# Altium PCB Plata.PcbDoc
Units mm, origin at the board's own origin, x right, y up, seen from the top; angles counter-clockwise.
Board outline 65 x 65 mm, 2 copper layers (Top Layer, Bottom Layer), stack 1.571 mm thick; 45 components, 45 nets, 179 pads, 49 vias.
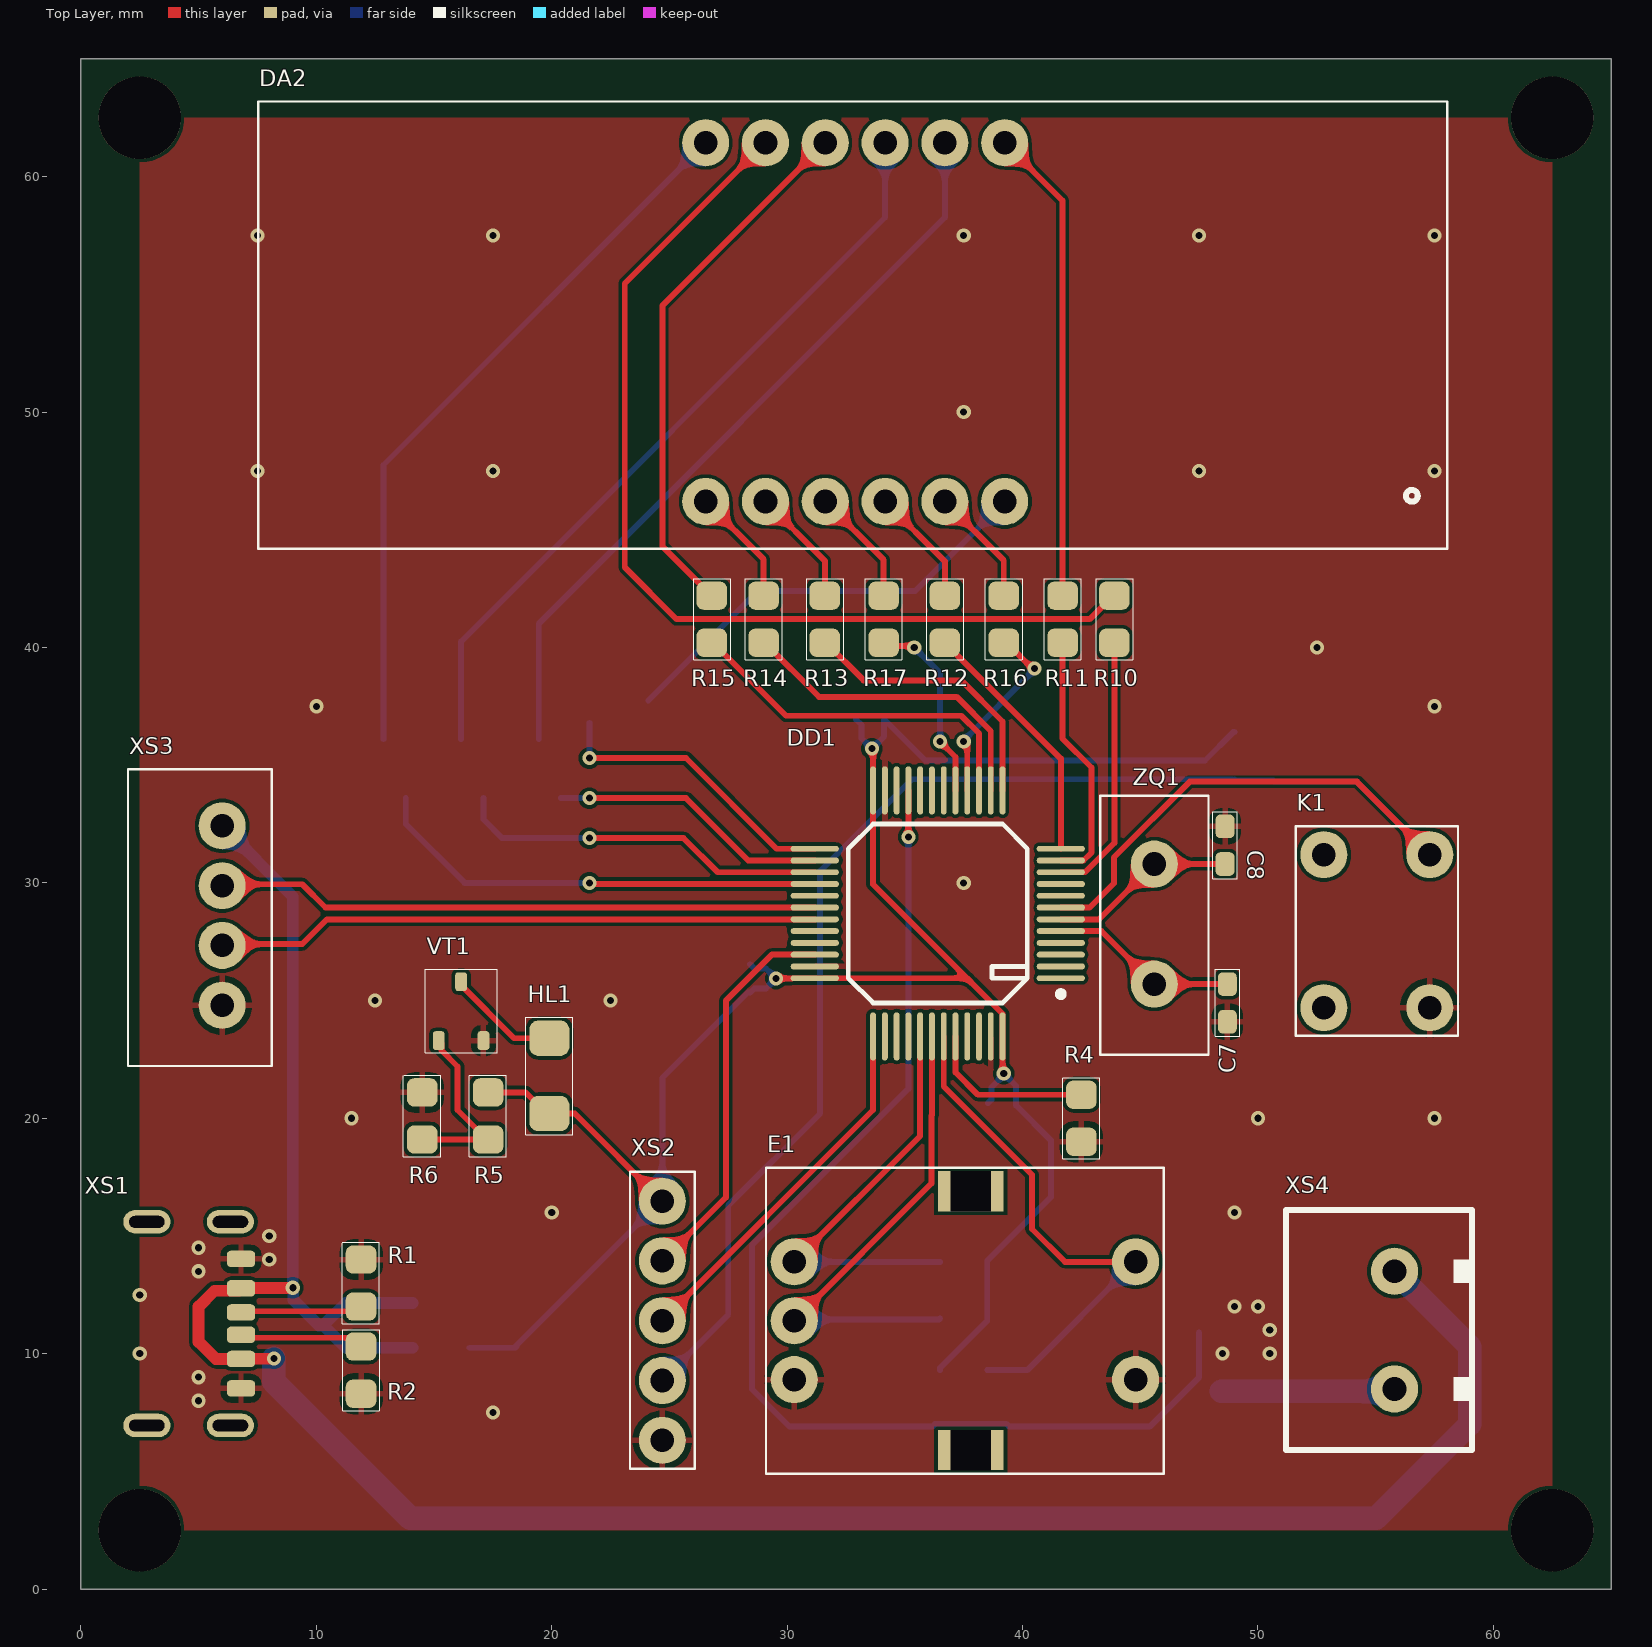
[diagram p0: Top Layer view]
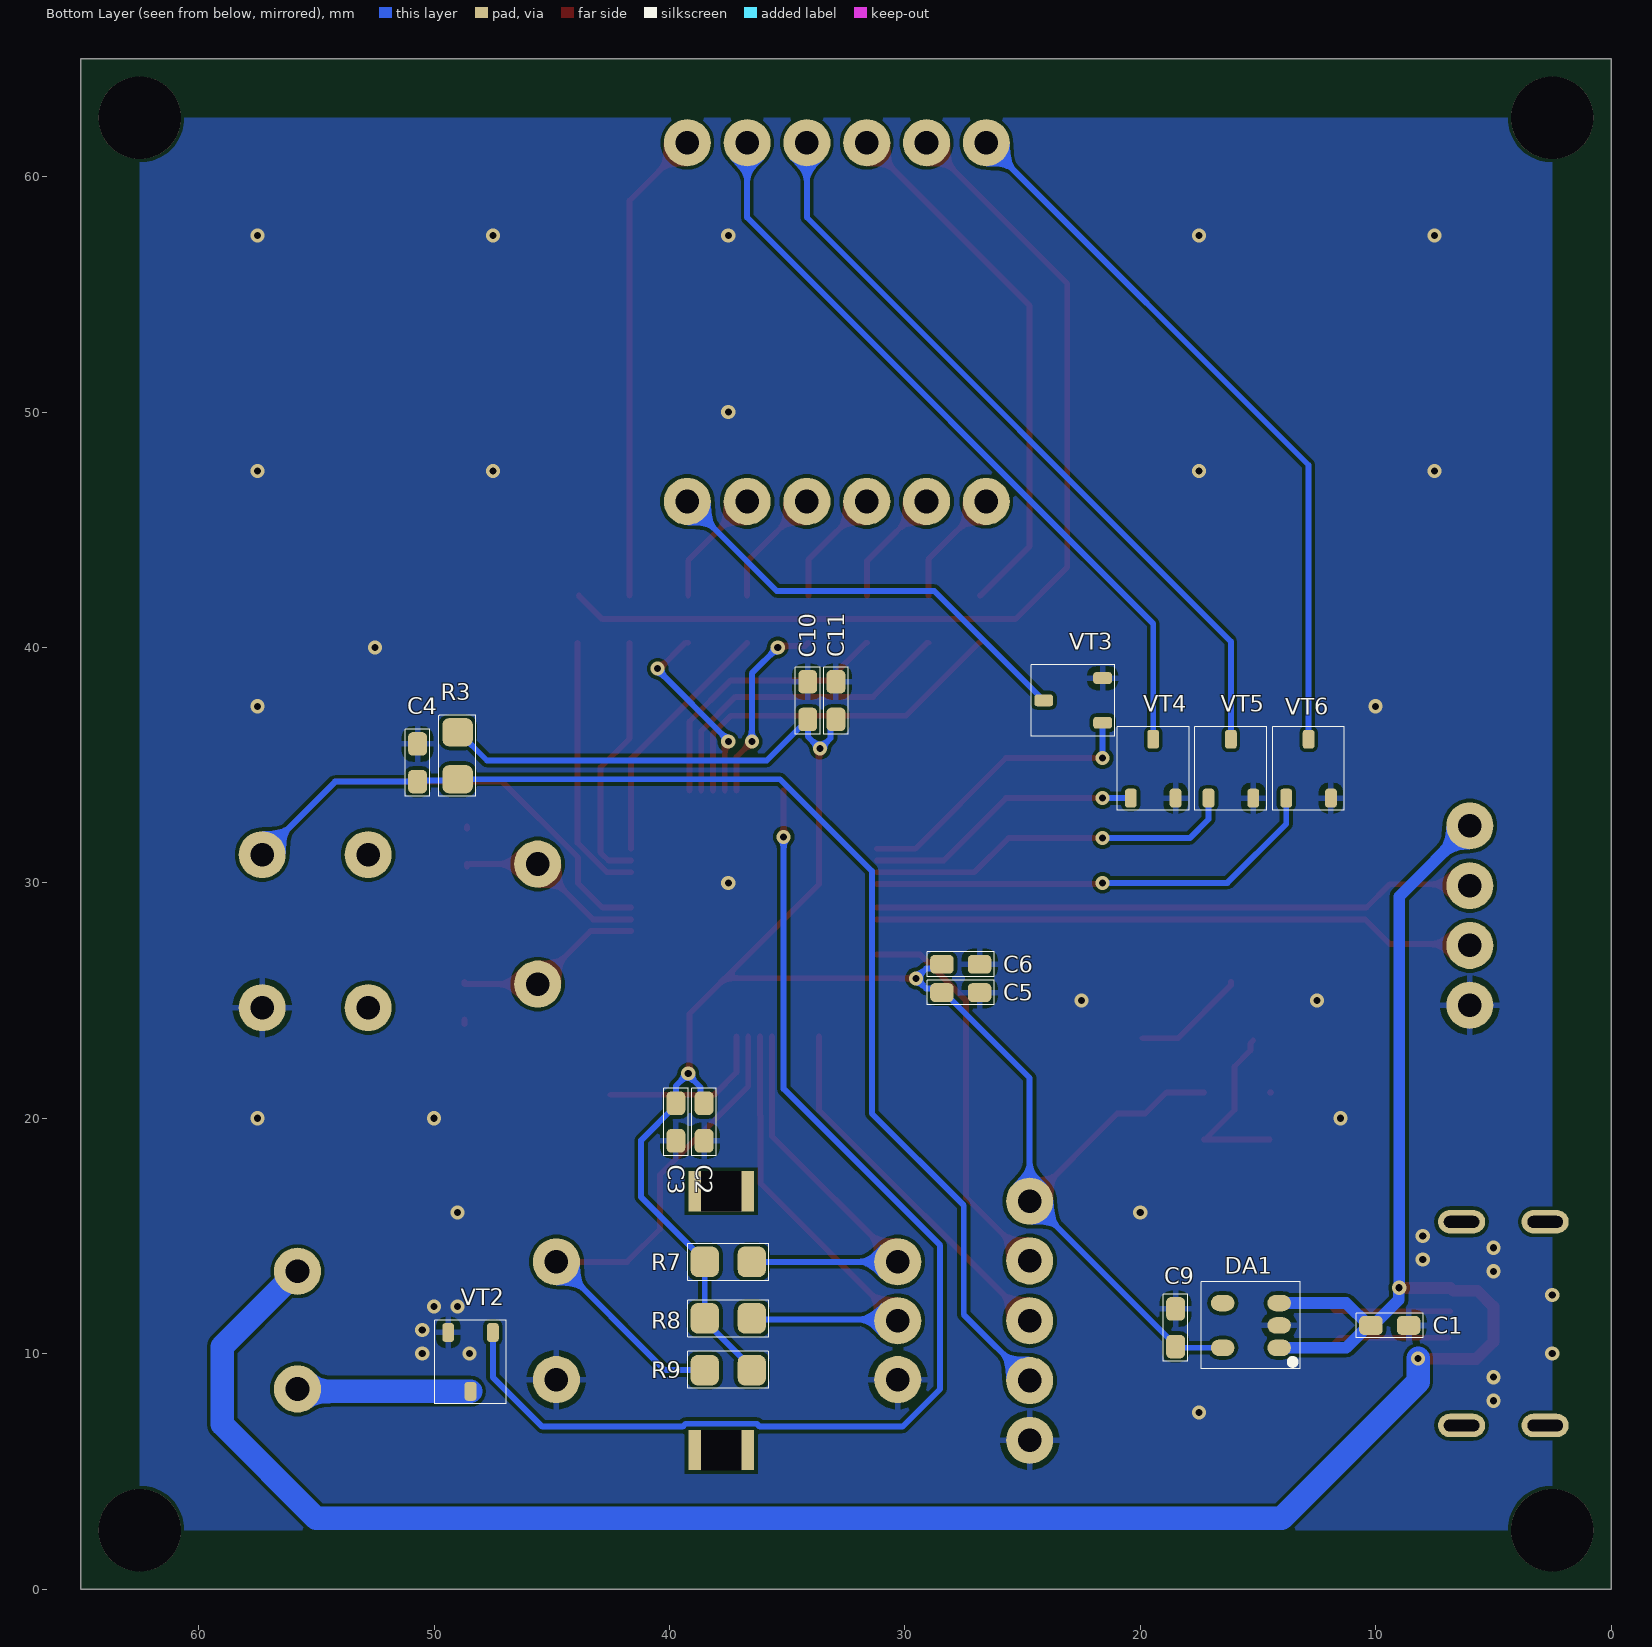
[diagram p1: Bottom Layer view, seen from below]
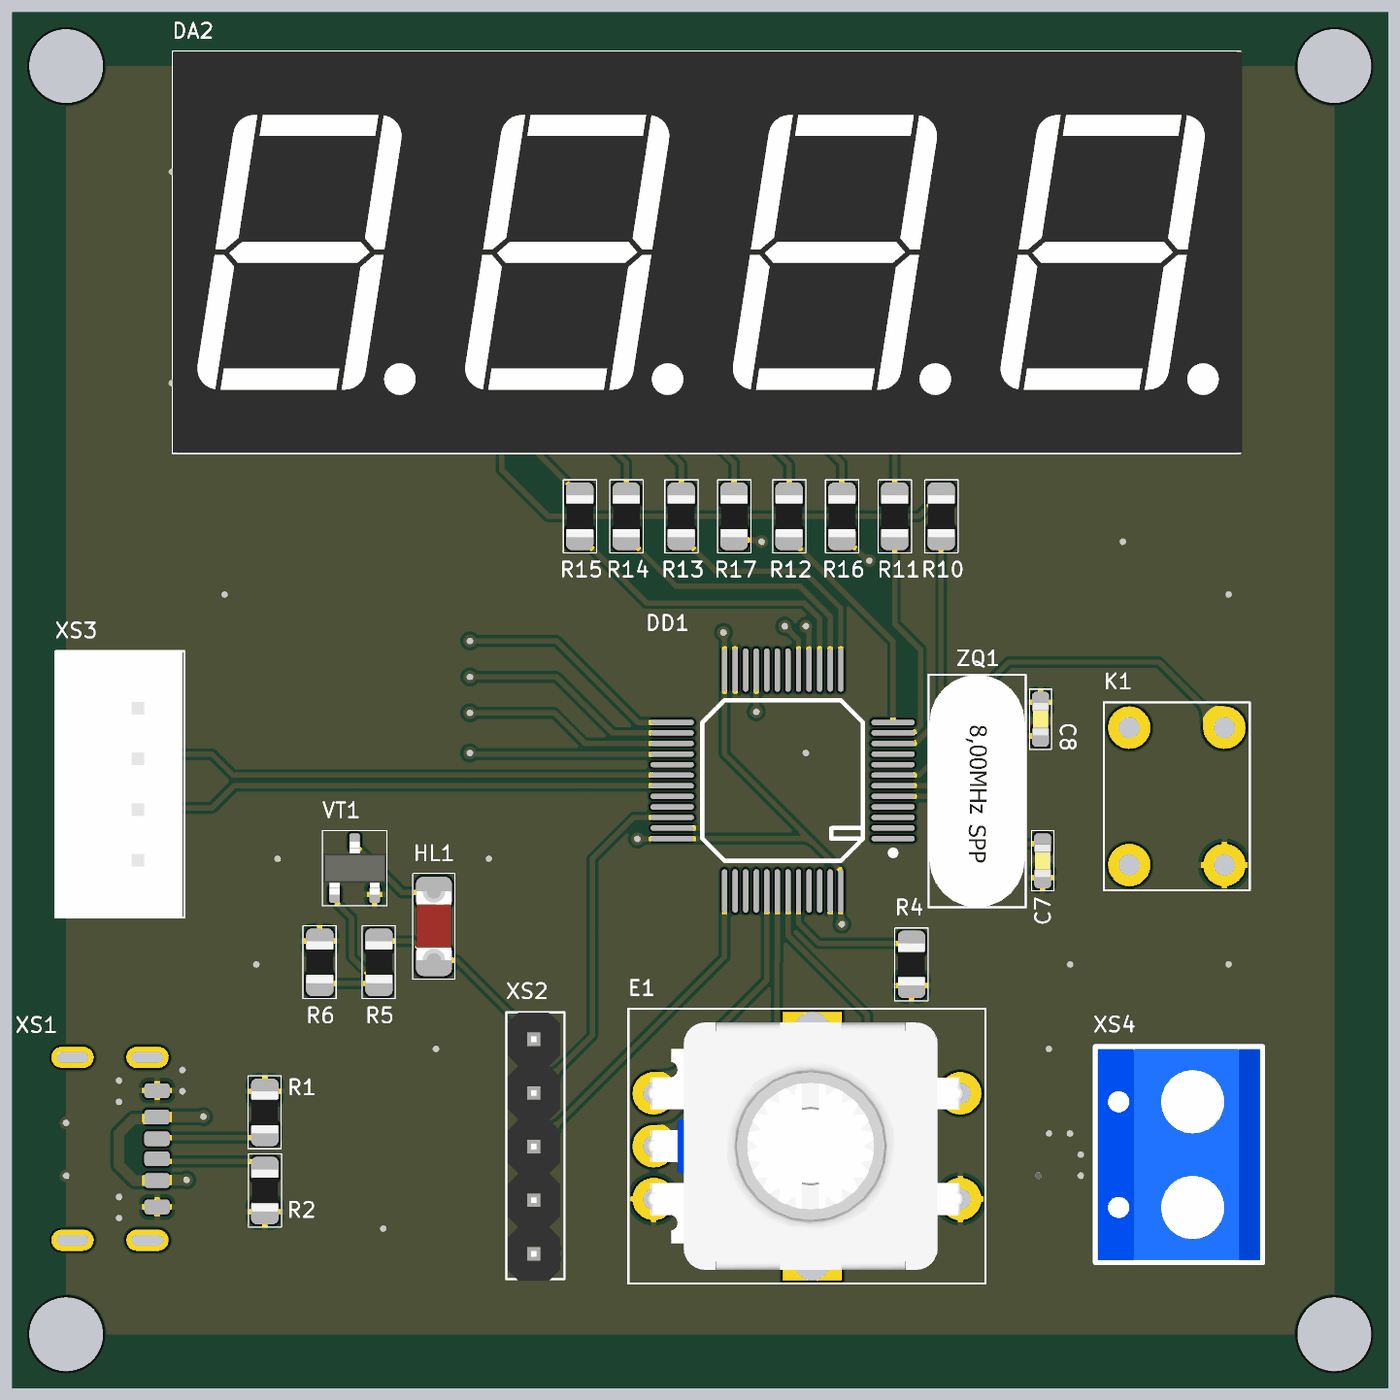
[diagram p2: 3D render of the assembled board from above, using the file's embedded part models]
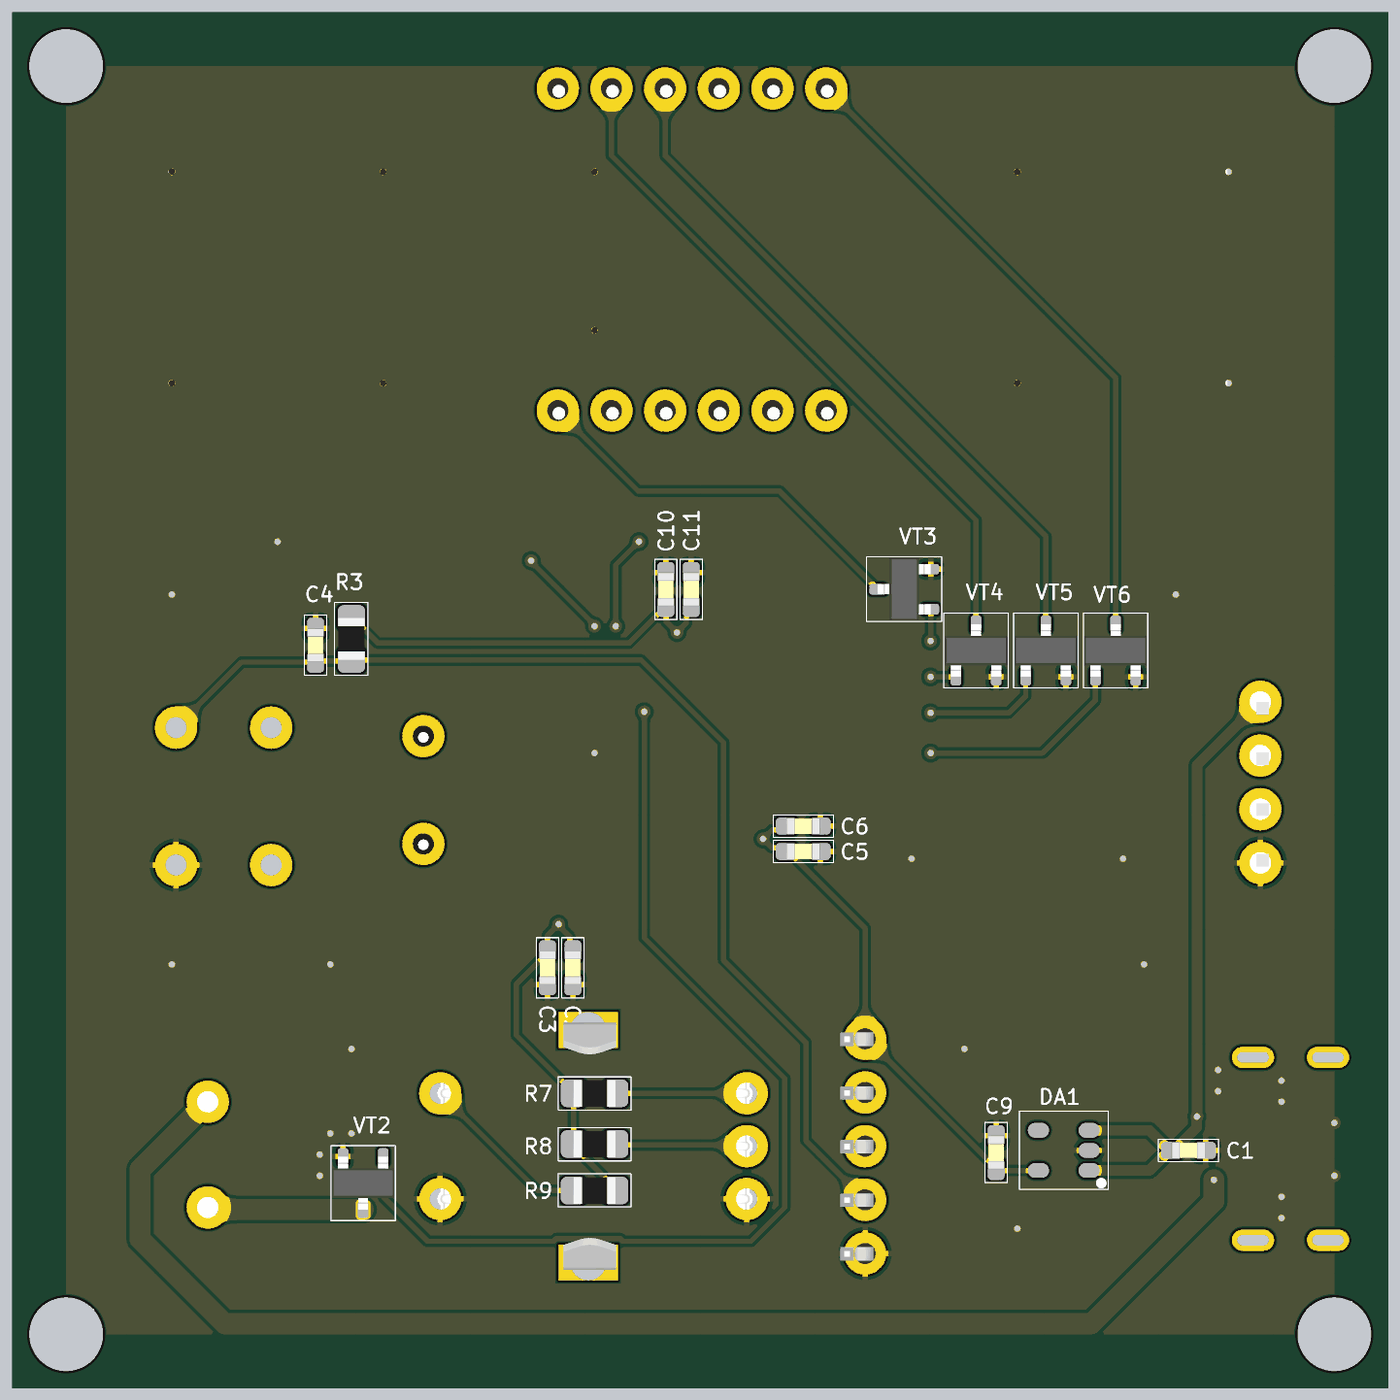
[diagram p3: 3D render of the assembled board from below, using the file's embedded part models]

## Layer stack, top to bottom
Top Solder: solder mask 0.0102, Solder Resist, Dk 3.5
Top Layer: signal copper 0.0356
Dielectric 1: dielectric 1.5, FR-4, Dk 4.8
Bottom Layer: signal copper 0.0356
Bottom Solder: solder mask 0.0102, Solder Resist, Dk 3.5

## Board outline
0,0 65,0 65,65 0,65

## Design rules (kind name [scope] priority, off if disabled: settings)
Clearance [All] p1: gap=0.15 ignorepadtopadclearanceinfootprint=FALSE
HoleSize [All] p1: absolutevalues=TRUE maxlimit=8 minlimit=0.025 maxpercent=80.000 minpercent=20.000
HoleToHoleClearance [All] p1: gap=0.15 allowstackedmicrovias=TRUE
MinimumSolderMaskSliver [All] p1: minsoldermaskwidth=0.15
PlaneClearance [All] p1: clearance=0.25
PlaneConnect [All] p1: planeconnectstyle=Relief reliefexpansion=0.508 reliefentries=4 reliefconductorwidth=0.25 reliefairgap=0.25
PolygonConnect [All] p1: thpad.connectstyle=Relief thpad.reliefconductorwidth=0.25 thpad.reliefentries=4 thpad.polygonreliefangle="90 Angle" thpad.airgapwidth=0.25 smdpad.connectstyle=Relief smdpad.reliefconductorwidth=0.25 smdpad.reliefentries=4 smdpad.polygonreliefangle="90 Angle" smdpad.airgapwidth=0.25 via.connectstyle=Direct via.reliefconductorwidth=0.254 via.reliefentries=4 via.polygonreliefangle="90 Angle" via.airgapwidth=0.254
RoutingCorners [All] p1: cornerstyle=45-Degree minsetback=1.5 maxsetback=1.5
RoutingVias [All] p1: holewidth=0.3 width=0.6 viastyle="Through Hole" minholewidth=0.3 minwidth=0.6 maxholewidth=3 maxwidth=3
SilkToSilkClearance [All] p1: silktosilkclearance=0.05
SolderMaskExpansion [All] p1: expansion=0.102 istentingtop=FALSE
Width [All] p1: maxlimit=1 minlimit=0.15 preferedwidth=0.2 minimp=50.000000 maximp=50.000000 favimp=50.000000
23 further rules are at their usual default settings.

## Components (designator, comment, footprint, x,y, rotation, side; value= is the part's Value field where it differs from the comment)
C1 "SetValue!" C_SMD_0603 8.6,11.2 r0 bottom
C2 "SetValue!" C_SMD_0603 38.527,20.64 r270 bottom
C3 "SetValue!" C_SMD_0603 39.727,19.04 r90 bottom
C4 "SetValue!" C_SMD_0603 50.7,35.9 r270 bottom
C5 "SetValue!" C_SMD_0603 28.427,25.34 r180 bottom
C6 "SetValue!" C_SMD_0603 26.827,26.54 r0 bottom
C7 "SetValue!" C_SMD_0603 48.7,25.7 r270 top
C8 "SetValue!" C_SMD_0603 48.6,30.8 r90 top
C9 "SetValue!" C_SMD_0603 18.5,11.9 r270 bottom
C10 "SetValue!" C_SMD_0603 34.127,36.94 r90 bottom
C11 "SetValue!" C_SMD_0603 32.927,38.54 r270 bottom
DA1 "STU_5.5-3.3_NCP114ASN330T1G_SMD_TSOP-5" TSOP-5 15.3,11.2 r0 bottom
DA2 "Indicator_4x7" "4x7 Inditacor" 26.54,61.44 r0 top
DD1 "STM32F103C8T6" LQFP48 36.4,28.7 r180 top
E1 "Encoder" ENCODER 30.3,13.9 r270 top
HL1 "LED_SMD_RED" LED_SMD_RED 19.9,20.2 r90 top
K1 "BUT_SMD_KLS7-TS3608-5.0-180" BUT_SMD_KLS7-TS3608-5.0-180 57.3,31.2 r270 top
R1 "SetValue!" R_SMD_0805 11.9,12 r90 top
R2 "SetValue!" R_SMD_0805 11.9,10.3 r270 top
R3 "SetValue!" R_SMD_0805 49,34.4 r90 bottom
R4 "SetValue!" R_SMD_0805 42.5,19 r90 top
R5 "SetValue!" R_SMD_0805 17.3,19.1 r90 top
R6 "SetValue!" R_SMD_0805 14.5,19.1 r90 top
R7 "SetValue!" R_SMD_0805 36.5,13.9 r0 bottom
R8 "SetValue!" R_SMD_0805 36.5,11.5 r0 bottom
R9 "SetValue!" R_SMD_0805 38.5,9.3 r180 bottom
R10 "SetValue!" R_SMD_0805 43.9,42.2 r270 top
R11 "SetValue!" R_SMD_0805 41.7,42.2 r270 top
R12 "SetValue!" R_SMD_0805 36.7,42.2 r270 top
R13 "SetValue!" R_SMD_0805 31.6,42.2 r270 top
R14 "SetValue!" R_SMD_0805 29,42.2 r270 top
R15 "SetValue!" R_SMD_0805 26.8,42.2 r270 top
R16 "SetValue!" R_SMD_0805 39.2,42.2 r270 top
R17 "SetValue!" R_SMD_0805 34.1,42.2 r270 top
VT1 "2N7002" SOT23-3 15.2,23.3 r90 top
VT2 "2N7002" SOT23-3 47.5,10.9 r270 bottom
VT3 "2N7002" SOT23-3 21.6,36.8 r0 bottom
VT4 "2N7002" SOT23-3 20.4,33.6 r90 bottom
VT5 "2N7002" SOT23-3 17.1,33.6 r90 bottom
VT6 "2N7002" SOT23-3 13.8,33.6 r90 bottom
XS1 "XS_USB-TYPE-C_Power" USB-TYPE-C_6P 6.8,14 r270 top
XS2 "XS_5PINS_PINS_Left" 5PINS 24.7,16.48 r270 top
XS3 "XS_4PINS_PINS_Left" 4PINS 6,32.42 r270 top
XS4 "XS_2PINS_Klema_Right" XS_2PINS 55.8,13.5 r0 top
ZQ1 "Quartz_8MGz_THT_HC-49S" Quartz 45.6,30.8 r270 top

## Footprints (in the part's own frame and the unit in brackets; to place one, negate y for a bottom-side part, rotate by r counter-clockwise, add the part's x,y. Pads: shape width x height; smd on the part's side, far side on the other; paste and mask are expansions set on the pad)
4PINS [mm]
  round 2 hole 1: 1(0,0) 2(2.54,0) 3(5.08,0) 4(7.62,0)
  silkscreen extent -2.4,-4 10.2,2.1, body extent -2.35,-4 10.15,2, height 7
"4x7 Inditacor" [mm]
  round 2 hole 1: 1(0,0) 2(2.54,0) 3(5.08,0) 4(7.62,0) 5(10.16,0) 6(12.7,0) 7(0,-15.24) 8(2.54,-15.24) 9(5.08,-15.24) 10(7.62,-15.24) 11(10.16,-15.24) 12(12.7,-15.24)
  silkscreen extent -19,-17.25 31.5,1.75, body extent -19,-17.25 31.6,1.75, height 8
5PINS [mm]
  round 2 hole 1: 1(0,0) 2(2.54,0) 3(5.08,0) 4(7.62,0) 5(10.16,0)
  silkscreen extent -1.25,-1.38 11.37,1.38, body extent -1.23,-1.33 11.43,1.17, height 8.61
BUT_SMD_KLS7-TS3608-5.0-180 [mm]
  round 2 hole 1: 1(0,0) 2(6.5,0) 3(0,-4.5) 4(6.5,-4.5)
  silkscreen extent -1.2,-5.7 7.7,1.2, body extent -0.69,-5.4 7.09,0.8, height 8
C_SMD_0603 [mm]
  rrect50% 1x0.8 smd: 1(0,0) 2(1.6,0)
  silkscreen extent -0.63,-0.53 2.22,0.53, body extent 0,-0.4 1.6,0.4, height 0.8
ENCODER [mm]
  round 2 hole 1: 1(0,14.5) 2(5,14.5) 3(0,0) 4(2.5,0) 5(5,0)
  rect 1.7x2.8 hole 1.7 square: 6(-3,7.5) 7(8,7.5)
  silkscreen extent -4,-1.2 9,15.7, body extent -3.36,-0.3 8.36,14.65, height 19.5
LED_SMD_RED [mm]
  rrect50% 1.5x1.7 smd: 1(0,0) 2(3.2,0)
  silkscreen extent -0.9,-1 4.1,1, body extent -0.01,-0.82 3.26,0.82, height 0.9
LQFP48 [mm]
  oval 2.05x0.25 smd: 1(-5.225,2.75) 2(-5.225,2.25) 3(-5.225,1.75) 4(-5.225,1.25) 5(-5.225,0.75) 6(-5.225,0.25) 7(-5.225,-0.25) 8(-5.225,-0.75) 9(-5.225,-1.25) 10(-5.225,-1.75) 11(-5.225,-2.25) 12(-5.225,-2.75) 25(5.225,-2.75) 26(5.225,-2.25) 27(5.225,-1.75) 28(5.225,-1.25) 29(5.225,-0.75) 30(5.225,-0.25) 31(5.225,0.25) 32(5.225,0.75) 33(5.225,1.25) 34(5.225,1.75) 35(5.225,2.25) 36(5.225,2.75)
  oval 0.25x2.05 smd: 13(-2.75,-5.225) 14(-2.25,-5.225) 15(-1.75,-5.225) 16(-1.25,-5.225) 17(-0.75,-5.225) 18(-0.25,-5.225) 19(0.25,-5.225) 20(0.75,-5.225) 21(1.25,-5.225) 22(1.75,-5.225) 23(2.25,-5.225) 24(2.75,-5.225) 37(2.75,5.225) 38(2.25,5.225) 39(1.75,5.225) 40(1.25,5.225) 41(0.75,5.225) 42(0.25,5.225) 43(-0.25,5.225) 44(-0.75,5.225) 45(-1.25,5.225) 46(-1.75,5.225) 47(-2.25,5.225) 48(-2.75,5.225)
  silkscreen extent -5.35,-3.8 3.8,3.8, body extent -3.5,-3.5 3.5,3.5, height 1.4
Quartz [mm]
  round 2 hole 1: 1(0,0) 2(5.1,0)
  silkscreen extent -2.9,-2.3 8.1,2.3, body extent -2.89,-2.25 8.09,2.25, height 3.51
R_SMD_0805 [mm]
  rrect50% 1.2x1.3 smd: 1(0,0) 2(2,0)
  silkscreen extent -0.72,-0.77 2.73,0.8, body extent 0,-0.62 2,0.63, height 0.5
SOT23-3 [mm]
  rrect50% 0.8x0.5 smd: 1(0,0) 2(0,-1.9) 3(2.5,-0.95)
  silkscreen extent -0.53,-2.47 3.03,0.58, body extent 0,-2.45 2.5,0.55, height 1.1
TSOP-5 [mm]
  oval 1x0.7 smd: 1(-1.2,0.95) 2(-1.2,0) 3(-1.2,-0.95) 4(1.2,-0.95) 5(1.2,0.95)
  silkscreen extent -2.1,-1.85 2.1,1.85, body extent -0.85,-1.6 0.85,1.6, height 1
USB-TYPE-C_6P [mm]
  rrect50% 0.7x1.2 smd: 1(-0.025,0) 2(1.225,0) 3(2.25,0) 4(3.2,0) 5(4.225,0) 6(5.475,0)
  oval 1x2 hole 0.5 slot 1.5 at 90 deg: 110(-1.6,-0.45) 111(-1.6,-4) 112(7.05,-0.45) 113(7.05,-4)
  body extent -1.75,-6.74 7.2,0.13, height 3.3
XS_2PINS [mm]
  round 2 hole 1: 1(0,0) 2(0,-5)
  silkscreen extent -4.6,-7.6 3.3,2.6, body extent -4.5,-7.5 3.2,2.5, height 11

## Part data
C1 C2 C3 C4 C5 C6 C7 C8 C9 C10 C11: library part C_Ceramic_SMD_0603
DD1: library part STM32_F103c8t6_LQFP48
R1 R2 R3 R4 R5 R6 R7 R8 R9 R10 R11 R12 R13 R14 R15 R16 R17: library part R_SMD_0805
VT1 VT2 VT3 VT4 VT5 VT6: library part T_PI_N_2N7002_SMD_SOT-23-3_1

## Free pads (board coordinates)
  round 3.5 hole 3.5 unplated: 111(2.5,62.5) 112(62.5,62.5) 113(2.5,2.5) 114(62.5,2.5)

## Via types
v1: diameter 0.6, hole 0.3, Top Layer to Bottom Layer, tented top, 49 vias

## Nets (pads, with @x,y where several pads share a name; then routed paths per layer and width w, separated by ;. In a path a pad name is that pad's centre, name@x,y a point inside that pad or via, vN(x,y) a via of type N, cw(c..) or ccw(c..) an arc to the next point about the centre after c; other vN are vias at no path point)
GND: C1.1 C2.2 C3.1 C4.1 C5.2 C6.1 C7.2 C8.2 C9.1 C10.2 C11.1 DA1.2 DD1.23 DD1.35 DD1.47 E1.2 E1.5 K1.2 R1.2 R2.2 R4.1 R6.2 VT1.2 VT2.2 VT3.2 VT4.2 VT5.2 VT6.2 XS1.1 XS1.6 XS2.5 XS3.4 | length 0.3
  Top Layer w0.25: R6.2@14.45,21.1 R6.2 ; C8.2@48.6,32.3 48.6,32.341 C8.2 ; C7.2@48.7,24 C7.2 C7.2@48.7,24.2
  other v1: 17.5,7.5 5,8 5,9 2.5,10 48.5,10 50.5,10 50.5,11 49,12 50,12 2.5,12.5 5,13.5 8,14 5,14.5 8,15 20,16 49,16 11.5,20 50,20 57.5,20 12.5,25 22.5,25 37.5,30 10,37.5 57.5,37.5 52.5,40 7.5,47.5 17.5,47.5 47.5,47.5 57.5,47.5 37.5,50 7.5,57.5 17.5,57.5 37.5,57.5 47.5,57.5 57.5,57.5
NetC1_2: C1.2 DA1.1 DA1.3 XS1.2 XS1.5 XS3.1 XS4.1 | length 104.5
  Top Layer w0.5: v1(8.2,9.8) 8.188,9.788 6.813,9.788 XS1.5 5.725,9.775 5,10.5 5,12 5.675,12.675 6.7,12.675 XS1.2 6.813,12.788 8.988,12.788 v1(9,12.8)
  Bottom Layer w0.5: XS3.1 9,29.42 v1(9,12.8) 9.019,12.781 9.019,12.281 10.1,11.2 C1.2 C1.2@10.3,11.2 ; DA1.1 11.25,10.25 C1.2@10.3,11.2 ; DA1.3 11.25,12.15 C1.2@10.3,11.2
  Bottom Layer w1: v1(8.2,9.8) 8.2,8.8 14,3 55,3 59,7 59,10.3 XS4.1
NetC2_1: C2.1 C3.2 C5.1 C6.2 C9.2 C10.1 C11.2 DA1.5 DD1.24 DD1.36 DD1.48 HL1.1 R3.2 R5.2 R7.2 R8.2 R9.2 XS2.1 | length 93.5
  Top Layer w0.25: R5.2 18.889,21.1 19.789,20.2 HL1.1 20.98,20.2 XS2.1 ; v1@29.532,25.945 v1(29.527,25.94) 30.202,25.94 30.212,25.95 DD1.36 37.641,25.95 ; v1(33.6,35.7) 33.65,35.65 DD1.24 33.65,29.941 37.641,25.95 ; v1(39.2,21.9) 39.15,21.95 DD1.48 39.15,24.441 37.641,25.95
  Bottom Layer w0.25: DA1.5 18.45,10.25 C9.2 18.5,10.359 24.621,16.48 XS2.1 24.7,21.713 28.327,25.34 C5.1 28.603,25.516 29.103,25.516 v1(29.527,25.94) 29.103,26.364 28.603,26.364 C6.2 ; C11.2 33.156,36.711 33.156,36.144 v1(33.6,35.7) 34.111,36.211 34.111,36.924 C10.1 35.867,35.2 47.75,35.2 48.95,36.4 R3.2 ; R9.2 36.5,9.4 38.5,11.4 R8.2 R7.2 38.5,13.95 41.2,16.65 41.2,19.067 39.727,20.54 39.727,21.373 v1(39.2,21.9) 39.2,21.834 38.673,21.307 38.673,20.786 C2.1
NetC4_2: C4.2 DD1.7 K1.1 R3.1 XS2.4 | length 73
  Top Layer w0.25: DD1.7@41.635,28.96 DD1.7 42.85,28.95 43.881,29.981 43.881,31.081 47.1,34.3 54.2,34.3 K1.1
  Bottom Layer w0.25: XS2.4 27.5,11.66 27.5,16.3 31.4,20.2 31.4,30.5 35.3,34.4 R3.1@48.9,34.4 ; R3.1 49.05,34.35 50.65,34.35 C4.2 54.2,34.3 K1.1
NetC7_1: C7.1 DD1.5 ZQ1.2 | length 8.1
  Top Layer w0.25: DD1.5 43.35,27.95 ZQ1.2 C7.1 C7.1@48.7,25.8
NetC8_1: C8.1 DD1.6 ZQ1.1 | length 8.1
  Top Layer w0.25: DD1.6 43.25,28.45 ZQ1.1 48.5,30.8 48.6,30.7 C8.1
NetDA2_1: DA2.1 VT6.3 | length 31
  Bottom Layer w0.25: VT6.3 12.85,47.75 DA2.1
NetDA2_2: DA2.2 R10.1 | length 42.6
  Top Layer w0.25: DA2.2 23.1,55.46 23.1,43.4 25.3,41.2 42.85,41.2 R10.1@43.85,42.2
NetDA2_3: DA2.3 R15.1 | length 23
  Top Layer w0.25: R15.1 24.7,44.3 24.7,54.52 DA2.3
NetDA2_4: DA2.4 VT5.3 | length 32.8
  Bottom Layer w0.25: VT5.3 16.15,40.25 34.16,58.26 DA2.4
NetDA2_5: DA2.5 VT4.3 | length 32.5
  Bottom Layer w0.25: VT4.3 19.45,41.01 36.7,58.26 DA2.5
NetDA2_6: DA2.6 R11.1 | length 20.3
  Top Layer w0.25: DA2.6 41.7,58.98 R11.1
NetDA2_7: DA2.7 R14.1 | length 5
  Top Layer w0.25: DA2.7 29,43.74 R14.1
NetDA2_8: DA2.8 R13.1 | length 5
  Top Layer w0.25: DA2.8 31.6,43.68 R13.1
NetDA2_9: DA2.9 R17.1 | length 5
  Top Layer w0.25: DA2.9 34.1,43.72 R17.1
NetDA2_10: DA2.10 R12.1 | length 5.1
  Top Layer w0.25: DA2.10 36.7,43.66 R12.1
NetDA2_11: DA2.11 R16.1 | length 5
  Top Layer w0.25: DA2.11 39.2,43.7 R16.1
NetDA2_12: DA2.12 VT3.3 | length 18.6
  Bottom Layer w0.25: VT3.3 28.75,42.4 35.44,42.4 DA2.12
NetDD1_10: DD1.10 R10.2 | length 11.3
  Top Layer w0.25: DD1.10 42.656,30.45 43.9,31.694 R10.2
NetDD1_11: DD1.11 R11.2 | length 10.9
  Top Layer w0.25: DD1.11 42.591,30.95 42.925,31.284 42.925,34.899 41.7,36.124 R11.2
NetDD1_12: DD1.12 R12.2 | length 10.8
  Top Layer w0.25: R12.2 41.625,35.275 DD1.12
NetDD1_13: DD1.13 R13.2 | length 11.9
  Top Layer w0.25: R13.2 31.65,40.2 33.25,38.6 37.4,38.6 39.15,36.85 DD1.13
NetDD1_14: DD1.14 R14.2 | length 13.7
  Top Layer w0.25: R14.2 29.05,40.2 31.35,37.9 37.2,37.9 38.65,36.45 DD1.14
NetDD1_15: DD1.15 R15.2 | length 15.4
  Top Layer w0.25: R15.2 26.85,40.2 29.95,37.1 37.4,37.1 38.15,36.35 DD1.15
NetDD1_16: DD1.16 R16.2 | length 8.2
  Top Layer w0.25: v1(37.5,36) 37.5,35.905 37.65,35.755 DD1.16 ; R16.2 39.325,40.2 40.425,39.1 v1(40.5,39.1)
  Bottom Layer w0.25: v1(37.5,36) 37.5,36.05 40.5,39.05 v1(40.5,39.1)
NetDD1_17: DD1.17 R17.2 | length 8.2
  Top Layer w0.25: R17.2 34.233,40.067 35.333,40.067 v1(35.4,40) ; v1(36.5,36) 37.15,35.35 DD1.17
  Bottom Layer w0.25: v1(35.4,40) 36.5,38.9 v1(36.5,36)
NetDD1_21: DD1.21 VT2.1 | length 50.7
  Top Layer w0.25: v1(35.15,31.95) DD1.21
  Bottom Layer w0.25: v1(35.15,31.95) 35.15,21.25 28.5,14.6 28.5,8.5 30.1,6.9 36.161,6.9 36.286,7.025 39.314,7.025 39.439,6.9 45.4,6.9 47.5,9 VT2.1
NetDD1_25: DD1.25 VT3.1 | length 12.7
  Top Layer w0.25: v1(21.6,35.3) 25.7,35.3 29.55,31.45 DD1.25
  Bottom Layer w0.25: v1(21.6,35.3) VT3.1
NetDD1_26: DD1.26 VT4.1 | length 11.9
  Top Layer w0.25: v1(21.6,33.6) 25.7,33.6 28.35,30.95 DD1.26
  Bottom Layer w0.25: VT4.1 v1(21.6,33.6)
NetDD1_27: DD1.27 VT5.1 | length 15.9
  Top Layer w0.25: v1(21.6,31.9) 25.6,31.9 27.05,30.45 DD1.27
  Bottom Layer w0.25: VT5.1 17.1,32.7 17.9,31.9 v1(21.6,31.9)
NetDD1_28: DD1.28 VT6.1 | length 19.5
  Top Layer w0.25: v1(21.6,30) 21.65,29.95 DD1.28
  Bottom Layer w0.25: VT6.1 13.8,32.5 16.3,30 v1(21.6,30)
NetDD1_34: DD1.34 XS2.2 | length 16.8
  Top Layer w0.25: XS2.2 27.397,16.637 27.397,24.997 29.35,26.95 DD1.34
NetDD1_37: DD1.37 XS2.3 | length 15.8
  Top Layer w0.25: XS2.3 33.65,20.35 DD1.37
NetDD1_41: DD1.41 E1.3 R7.1 | length 18
  Top Layer w0.25: E1.3 35.65,19.25 DD1.41
  Bottom Layer w0.25: E1.3 R7.1
NetDD1_42: DD1.42 E1.4 R8.1 | length 20.7
  Top Layer w0.25: E1.4 36.125,17.225 36.125,20.124 36.15,20.149 DD1.42
  Bottom Layer w0.25: E1.4 30.35,11.45 36.45,11.45 R8.1
NetDD1_43: DD1.43 E1.1 R9.1 | length 22.9
  Top Layer w0.25: DD1.43 36.65,21.35 40.4,17.6 40.4,15.3 41.8,13.9 E1.1
  Bottom Layer w0.25: R9.1 40.2,9.3 E1.1
NetDD1_44: DD1.44 R4.2 | length 7.3
  Top Layer w0.25: DD1.44 37.15,21.95 38.1,21 R4.2
NetHL1_2: HL1.2 VT1.3 | length 4.8
  Top Layer w0.25: VT1.3 16.15,25.65 18.4,23.4 HL1.2
NetR1_1: R1.1 XS1.3 | length 5.1
  Top Layer w0.25: XS1.3@6.85,11.8 11.7,11.8 R1.1
NetR2_1: R2.1 XS1.4 | length 5.6
  Top Layer w0.25: XS1.4@6.925,10.675 11.229,10.675 11.237,10.667 11.533,10.667 R2.1 R2.1@11.575,10.625
NetR5_1: R5.1 R6.1 VT1.1 | length 7.8
  Top Layer w0.25: R6.1 R5.1@17.25,19.1 ; VT1.1 15.325,23.175 15.325,22.875 16,22.2 16,20.35 R5.1@17.25,19.1 ; R5.1 R5.1@17.25,19.1
NetVT2_3: VT2.3 XS4.2 | length 7.4
  Bottom Layer w1: VT2.3 55.7,8.4 XS4.2
NetXS1_5: 
RX: DD1.30 XS3.2 | length 25.6
  Top Layer w0.25: XS3.2 6.06,29.94 9.4,29.94 10.39,28.95 11,28.95 DD1.30
TX: DD1.31 XS3.3 | length 25.6
  Top Layer w0.25: XS3.3 6.06,27.4 9.4,27.4 10.45,28.45 11,28.45 DD1.31
pads on no net: DA1.4 DD1.1 DD1.2 DD1.3 DD1.4 DD1.8 DD1.9 DD1.18 DD1.19 DD1.20 DD1.22 DD1.29 DD1.32 DD1.33 DD1.38 DD1.39 DD1.40 DD1.45 DD1.46 E1.6 E1.7 K1.3 K1.4 XS1.110 XS1.111 XS1.112 XS1.113

## Polygon pours and split planes (outlines as drawn)
GND on Bottom Layer "GND_L02_P000" (solid, remove dead copper, pour order 0): 2.5,62.5 2.5,2.5 62.5,2.5 62.5,62.5
GND on Top Layer "GND_L01_P001" (solid, remove dead copper, pour order 1): 2.5,62.5 2.5,2.5 62.5,2.5 62.5,62.5

## Silkscreen, mask and mechanical layers (free items; w line width, h text height)
Board:
  circle w0.1: c2.5,62.5 r1.5
  circle w0.1: c62.5,62.5 r1.5
  circle w0.1: c62.5,2.5 r1.5
  circle w0.1: c2.5,2.5 r1.5
  lines w0.1: 0,0 0,65 65,65 65,0 0,0